# EAGLE board TOGETHER (EAGLE 9.4.2)
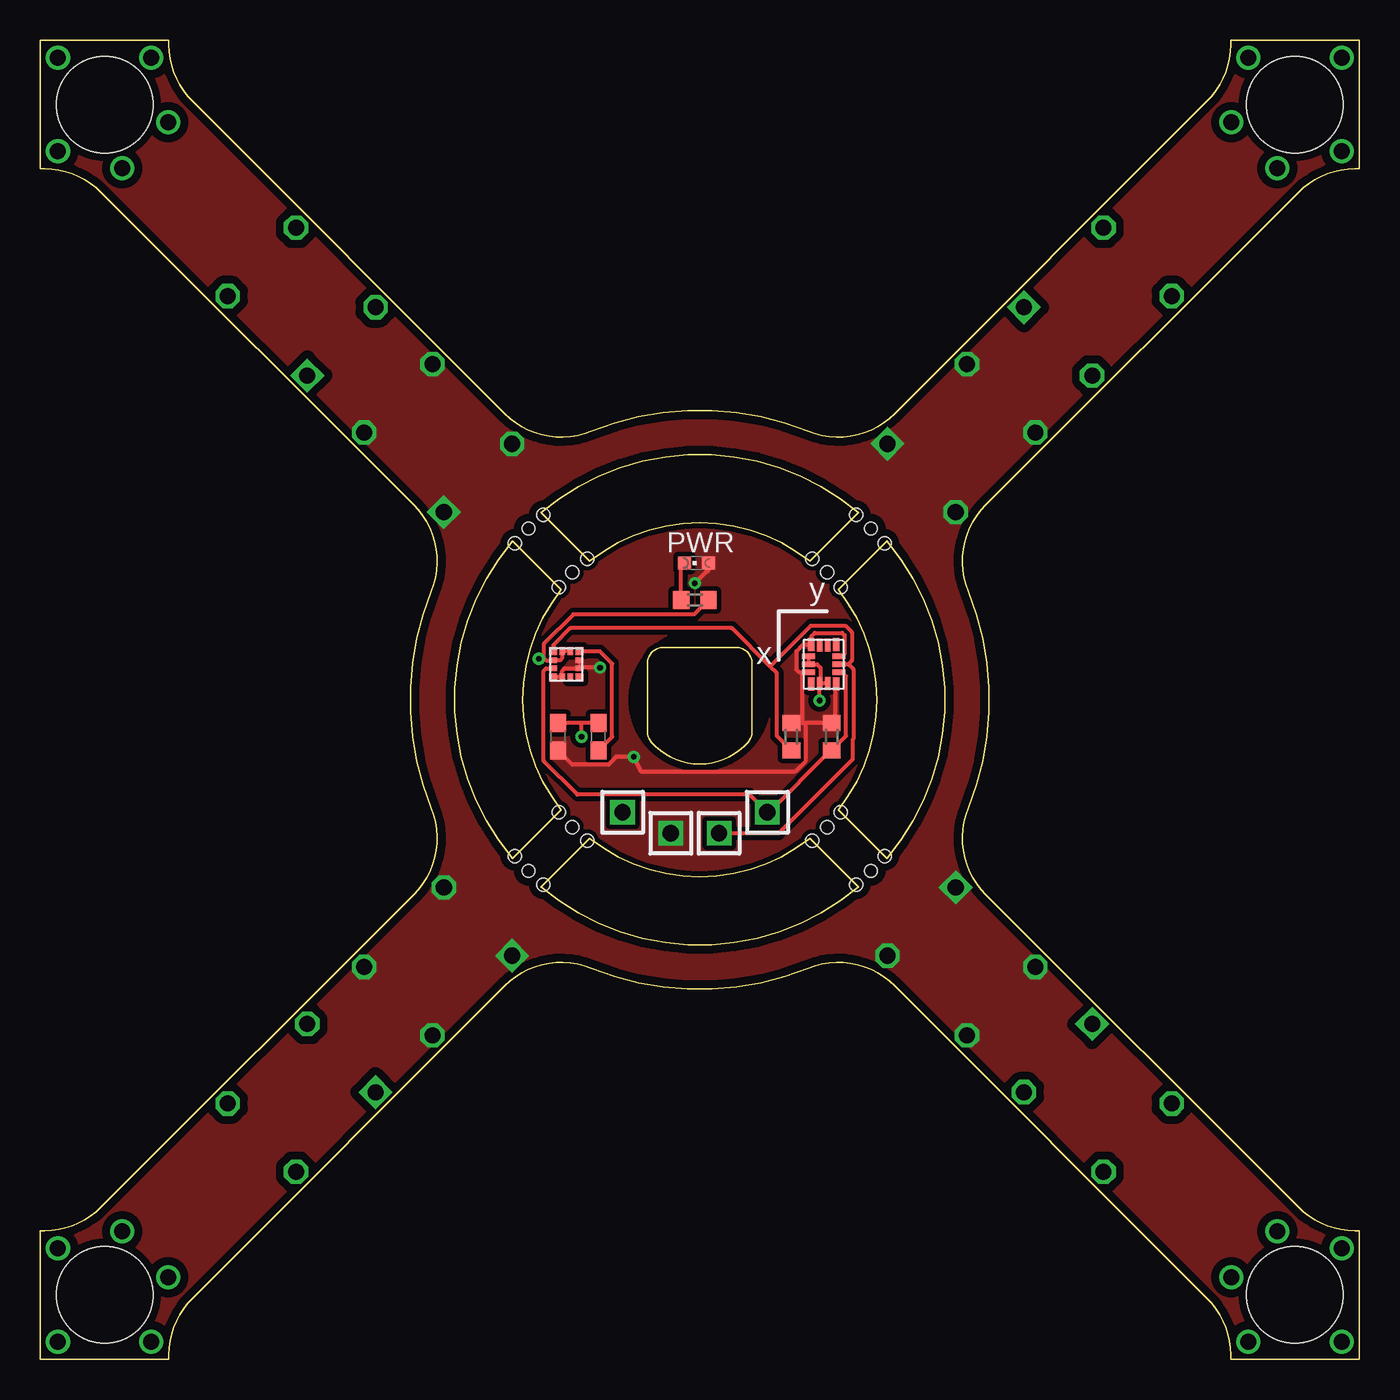
[diagram p0: board, top side]
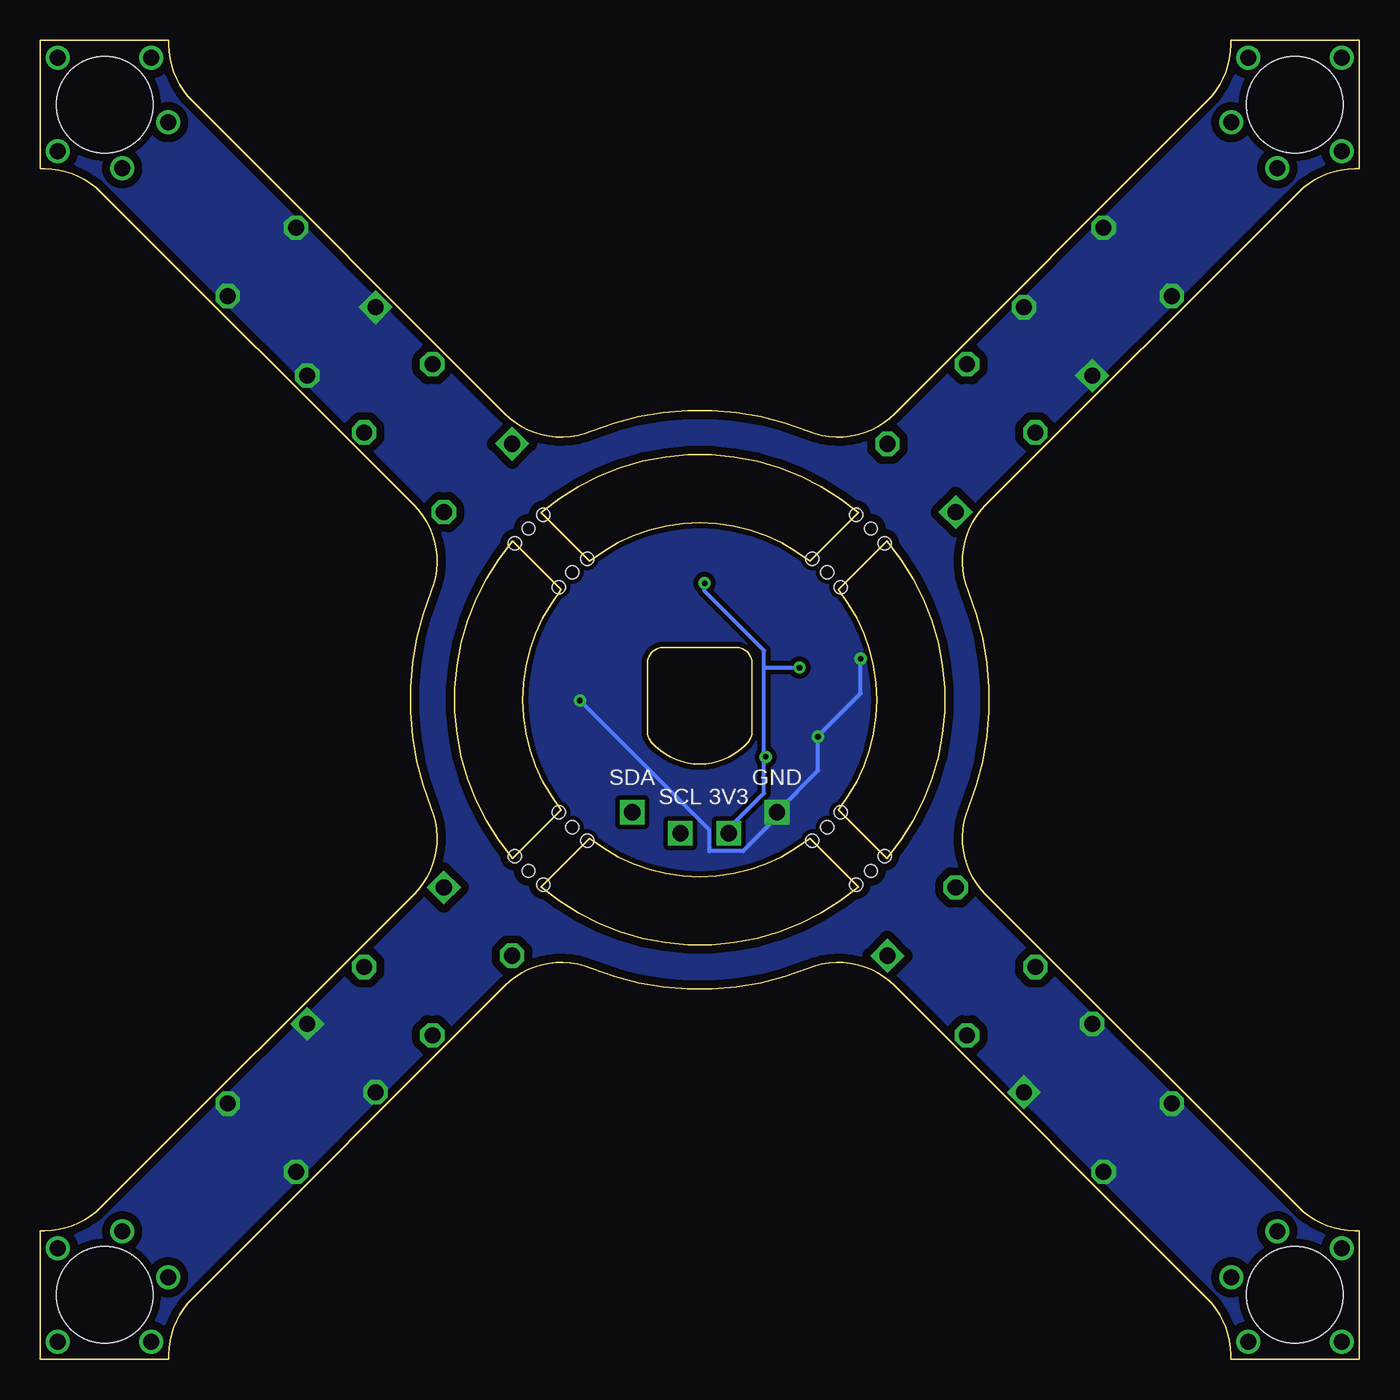
[diagram p1: board, bottom side, seen from below]

Size 82 x 82 mm. Coordinates in mm from the lower left corner, seen from the top.
Outline: 37.75,39.02 37.75,43.25 arc-90 38.75,44.25 43.25,44.25 arc-90 44.25,43.25 44.25,39.02 arc-41 44,38.35 arc-97 38,38.35 arc-41 37.75,39.02
Outline: 0,0 8,0 8,0.27 arc-45 9.46,3.81 28.86,23.2 arc-67 34.27,24.31 arc44 47.73,24.31 arc-67 53.14,23.2 72.54,3.81 arc-45 74,0.27 74,0 82,0 82,8 81.73,8 arc-45 78.19,9.46 58.8,28.86 arc-67 57.69,34.27 arc44 57.69,47.73 arc-67 58.8,53.14 78.19,72.54 arc-45 81.73,74 82,74 82,82 74,82 74,81.73 arc-45 72.54,78.19 53.14,58.8 arc-67 47.73,57.69 arc44 34.27,57.69 arc-67 28.86,58.8 9.46,78.19 arc-45 8,81.73 8,82 0,82 0,74 0.27,74 arc-45 3.81,72.54 23.2,53.14 arc-67 24.31,47.73 arc44 24.31,34.27 arc-67 23.2,28.86 3.81,9.46 arc-45 0.27,8 0,8 0,0
Outline: 50.86,52.63 47.84,49.61 arc77 34.16,49.61 31.14,52.63 arc-81 50.86,52.63
Outline: 29.37,31.14 32.39,34.16 arc-77 32.39,47.84 29.37,50.86 arc81 29.37,31.14
Outline: 50.86,29.37 47.84,32.39 arc-77 34.16,32.39 31.14,29.37 arc81 50.86,29.37
Outline: 52.63,50.86 49.61,47.84 arc-77 49.61,34.16 52.63,31.14 arc81 52.63,50.86
Copper layers (1*16): Top 0.035mm / dielectric 1.5mm / Bottom 0.035mm
Design rules "default *": minimum track width 0.25mm, minimum drill 0.35mm, track to track 0.2mm, track to pad 0.2mm, pad to pad 0.15mm, via to via 0.2mm, smd to smd 0.2mm, copper to edge 0.19mm, drill to drill 0.1mm, minimum pad ring 10mil, minimum via ring 8mil, stop-mask expansion 4mil, vias tented up to drill 0mil, thermal gap 10mil
Holes 6 mm at 4,4 78,78 4,78 78,4
Holes 0.8 mm at 29.51,31.28 48.92,33.08 49.75,34.01 52.49,50.72 51.64,51.64 50.72,52.49 49.75,47.99 31.28,52.49 30.36,51.64 31.28,29.51 29.51,50.72 47.99,49.75 48.92,48.92 34.01,49.75 32.25,47.99 32.25,34.01 33.08,33.08 34.01,32.25 50.72,29.51 51.64,30.36 52.49,31.28 47.99,32.25 33.08,48.92 30.36,30.36
tRestrict: area 37,37 to 45,45

## Footprints (pad centres in the part's own frame; a part is rotated, then mirrored left to right if it is on the bottom)
1X01 = drill 1.016 square: 1 0,0
C0603 = smd 1.1 x 1: 1 -0.85,0; 2 0.85,0
LIS3MDL = smd 0.5 x 0.5: P$1 -0.825,0.825; P$4 -0.825,-0.825; P$7 0.825,-0.825; P$10 0.825,0.825 | smd 0.5 x 0.35: P$2 -0.825,0.25; P$3 -0.825,-0.25; P$8 0.825,-0.25; P$9 0.825,0.25 | smd 0.35 x 0.5: P$5 -0.25,-0.825; P$6 0.25,-0.825; P$11 0.25,0.825; P$12 -0.25,0.825
LSM6DS3 = smd 0.8 x 0.4: P$1 -1.225,0.775; P$4 -1.225,-0.775; P$8 1.225,-0.775; P$11 1.225,0.775 | smd 0.8 x 0.35: P$2 -1.2,0.25; P$3 -1.2,-0.25; P$9 1.2,-0.25; P$10 1.2,0.25 | smd 0.35 x 0.8: P$5 -0.5,-0.95; P$6 0,-0.95; P$7 0.5,-0.95; P$12 0.5,0.95; P$13 0,0.95; P$14 -0.5,0.95
CHIPLED_0603 = smd 0.8 x 0.8: A 0,-0.75; C 0,0.75
R0603 = smd 1 x 1.1: 1 -0.85,0; 2 0.85,0
KCONNECT- = drill 1 pad 1.4 square: 1 -3,-3.5 | drill 1 pad 1.4 octagon: 2 -3,3.5; 3 3,-3.5; 4 3,3.5

## Placement (x,y rotation side)
3V3  [1X01]  39.2,32.7 0 top
C1  0,1µ  [C0603]  32.2,38.7 90 top
C10  0,1µ  [C0603]  34.7,38.7 90 top
GND  [1X01]  36.2,34 0 top
LIS3MDL  LIS3MDL  [LIS3MDL]  32.7,43.2 90 top
LSM6DS3  LSM6DS3  [LSM6DS3]  48.7,43.2 270 top
PWR  [CHIPLED_0603]  40.8,49.5 90 top
R1  2k  [R0603]  40.7,47.2 180 top
R101  5k1  [R0603]  46.7,38.7 270 top
R102  5k1  [R0603]  49.2,38.7 270 top
SCL  [1X01]  42.2,32.7 0 top
SDA  [1X01]  45.2,34 0 top
U$1  KCONNECT-  [KCONNECT-]  16.25,65.75 45 top
U$2  KCONNECT-  [KCONNECT-]  24.74,57.26 45 top
U$3  KCONNECT-  [KCONNECT-]  65.75,65.75 315 top
U$4  KCONNECT-  [KCONNECT-]  57.26,57.26 315 top
U$18  KCONNECT-  [KCONNECT-]  16.25,16.25 135 top
U$19  KCONNECT-  [KCONNECT-]  24.74,24.74 135 top
U$20  KCONNECT-  [KCONNECT-]  65.75,16.25 225 top
U$21  KCONNECT-  [KCONNECT-]  57.26,24.74 225 top

## Library data of the parts
3V3 GND SCL SDA = pinheadCS
C1 C10 = rcl; SPICEPREFIX: C
LIS3MDL LSM6DS3 U$1-U$4 U$18-U$21 = CanCubeSat
PWR = led
R1 R101 R102 = resistor

## Nets
BUS+: U$1.1 U$1.2 U$1.3 U$1.4 U$3.1 U$3.2 U$3.3 U$3.4 U$18.1 U$18.2 U$18.3 U$18.4 U$20.1 U$20.2 U$20.3 U$20.4
BUS-: U$2.1 U$2.2 U$2.3 U$2.4 U$4.1 U$4.2 U$4.3 U$4.4 U$19.1 U$19.2 U$19.3 U$19.4 U$21.1 U$21.2 U$21.3 U$21.4
GND: C1.2 C10.2 GND.1 LIS3MDL.P$8 LIS3MDL.P$9 LIS3MDL.P$11 LSM6DS3.P$5 LSM6DS3.P$6 LSM6DS3.P$9 LSM6DS3.P$10 R1.1
N$1: PWR.C R1.2
N$3: C10.1 LIS3MDL.P$7
SCL: LIS3MDL.P$10 LSM6DS3.P$13 R101.2 SCL.1
SDA: LIS3MDL.P$12 LSM6DS3.P$12 R102.2 SDA.1
VDD1: 3V3.1 C1.1 LIS3MDL.P$1 LIS3MDL.P$2 LIS3MDL.P$5 LIS3MDL.P$6 LSM6DS3.P$4 LSM6DS3.P$7 LSM6DS3.P$11 LSM6DS3.P$14 PWR.A R101.1 R102.1

## Tracks (layer width: path | path; a pad name or v marks a point on that pad's centre or on a via)
BUS+
  pour Bottom (isolate 0.5, rank 2, no thermals): 0,82 82,82 82,0 0,0
BUS-
  pour Top (isolate 0.5, rank 2, no thermals): 0,82 82,82 82,0 0,0
GND  (via drill 0.35)
  Top 0.25: LIS3MDL.P$8 32.95,44.05 32.55,44.05 LIS3MDL.P$9 32.45,43.6 32.3,43.45 LIS3MDL.P$11 31.45,43.45 31.3,43.6 | 31.3,43.6 31.18,43.73 v31,43.55 | 31.3,43.6 31.3,44.45 33.15,46.3 40.65,46.3 R1.1 | C10.2 33.65,39.55 | 33.65,39.55 C1.2 | LSM6DS3.P$10 LSM6DS3.P$9 | LSM6DS3.P$5 LSM6DS3.P$6 48.3,43.2 48.5,43 48.5,42.1 LSM6DS3.P$9 | v48.45,40.95 LSM6DS3.P$9 | v33.65,38.7 33.65,39.55
  Bottom 0.25: v48.45,40.95 40.4,32.9 40.4,31.6 38.3,31.6 36.2,33.7 GND.1 36.15,34.1 33.65,36.6 v33.65,38.7 33.6,38.8 31,41.4 v31,43.55
  pour Bottom (isolate 0.3, no thermals): 41,52 arc-90 52,41 arc-90 41,30 arc-90 30,41 arc-90
N$1
  Top 0.25: R1.2 39.85,49.3 PWR.C
N$3
  Top 0.25: C10.1 35.55,38.7 35.55,43.25 34.8,44 33.55,44 LIS3MDL.P$7
N$4  (via drill 1)
  other vias: 1.1,1.1
N$5  (via drill 1)
  other vias: 6.9,1.1
N$6  (via drill 1)
  other vias: 80.9,1.1
N$7  (via drill 1)
  other vias: 80.9,6.9
N$10  (via drill 1)
  other vias: 1.1,6.9
N$11  (via drill 1)
  other vias: 5.1,7.95
N$12  (via drill 1)
  other vias: 7.95,5.1
N$13  (via drill 1)
  other vias: 75.1,1.1
N$14  (via drill 1)
  other vias: 74.05,5.1
N$15  (via drill 1)
  other vias: 76.9,7.95
N$16  (via drill 1)
  other vias: 80.9,80.9
N$17  (via drill 1)
  other vias: 75.1,80.9
N$18  (via drill 1)
  other vias: 80.9,75.1
N$21  (via drill 1)
  other vias: 76.9,74.05
N$22  (via drill 1)
  other vias: 74.05,76.9
N$23  (via drill 1)
  other vias: 1.1,80.9
N$26  (via drill 1)
  other vias: 1.1,75.1
N$27  (via drill 1)
  other vias: 6.9,80.9
N$29  (via drill 1)
  other vias: 7.95,76.9
N$30  (via drill 1)
  other vias: 5.1,74.05
SCL
  Top 0.25: 45.38,43.08 45.8,42.65 45.8,38.75 R101.2 | 45.38,43.08 43,45.45 32.95,45.45 31.9,44.4 31.9,44.05 LIS3MDL.P$10 | 50.2,43.2 LSM6DS3.P$13 | 50.2,43.2 50.45,43.45 50.45,45.2 50.05,45.6 47.9,45.6 45.38,43.08 | SCL.1 45.9,32.7 50.5,37.3 50.5,38.5 50.55,38.55 50.55,42.9 50.3,43.15 50.2,43.2
SDA
  Top 0.25: LSM6DS3.P$12 49.85,42.7 50.1,42.45 50.1,38.75 R102.2 49.1,37.8 45.3,34 SDA.1 44.1,35.1 33.4,35.1 31.3,37.2 31.3,42.8 31.45,42.95 LIS3MDL.P$12
VDD1  (via drill 0.35)
  Top 0.25: LSM6DS3.P$14 49.85,43.7 50,43.85 50,45 49.85,45.15 48.15,45.15 47.95,44.95 47.95,44.5 LSM6DS3.P$4 47.9,44.4 47.4,44.4 47,44 47,42.9 47.2,42.7 LSM6DS3.P$7 | LSM6DS3.P$11 49.45,41.95 49.45,39.8 R102.1 47.6,39.55 | 47.6,39.55 47.4,39.55 | 47.4,39.55 R101.1 | 47.4,39.55 47.4,42.6 | LIS3MDL.P$5 33.55,42.95 33.55,43.45 LIS3MDL.P$6 | LIS3MDL.P$1 31.9,42.4 32.45,42.4 LIS3MDL.P$2 32.45,42.8 32.6,42.95 LIS3MDL.P$5 | v40.7,48.25 41.45,49 | v34.8,43 33.65,43 LIS3MDL.P$5 | 47.6,39.55 47.6,37.2 46.95,36.55 37.35,36.55 v36.9,37.45 35.81,37.45 35.34,36.98 33.08,36.98 C1.1
  Top 0.3: 41.45,49 41.55,49.1 PWR.A
  Bottom 0.25: v40.7,48.25 40.7,47.75 37,44.05 37,43 | 37,37.45 37,35.2 39.2,33 3V3.1 | 37,37.45 37,43 | v36.9,37.45 37,37.45 | 37,43 v34.8,43
  pour Top (isolate 0.3, no thermals): 41,52 arc-90 52,41 arc-90 41,30 arc-90 30,41 arc-90

## Text on the board
tNames: y | x